# Altium PCB TIDA-010967_PCB.PcbDoc (part 1 of 5)
Units mil, origin at the board's own origin, x right, y up, seen from the top; angles counter-clockwise.
Board outline 2322.7 x 960 mil, 2 copper layers (Top Layer, Bottom Layer), stack 44.731 mil thick; 178 components, 80 nets, 496 pads, 399 vias.
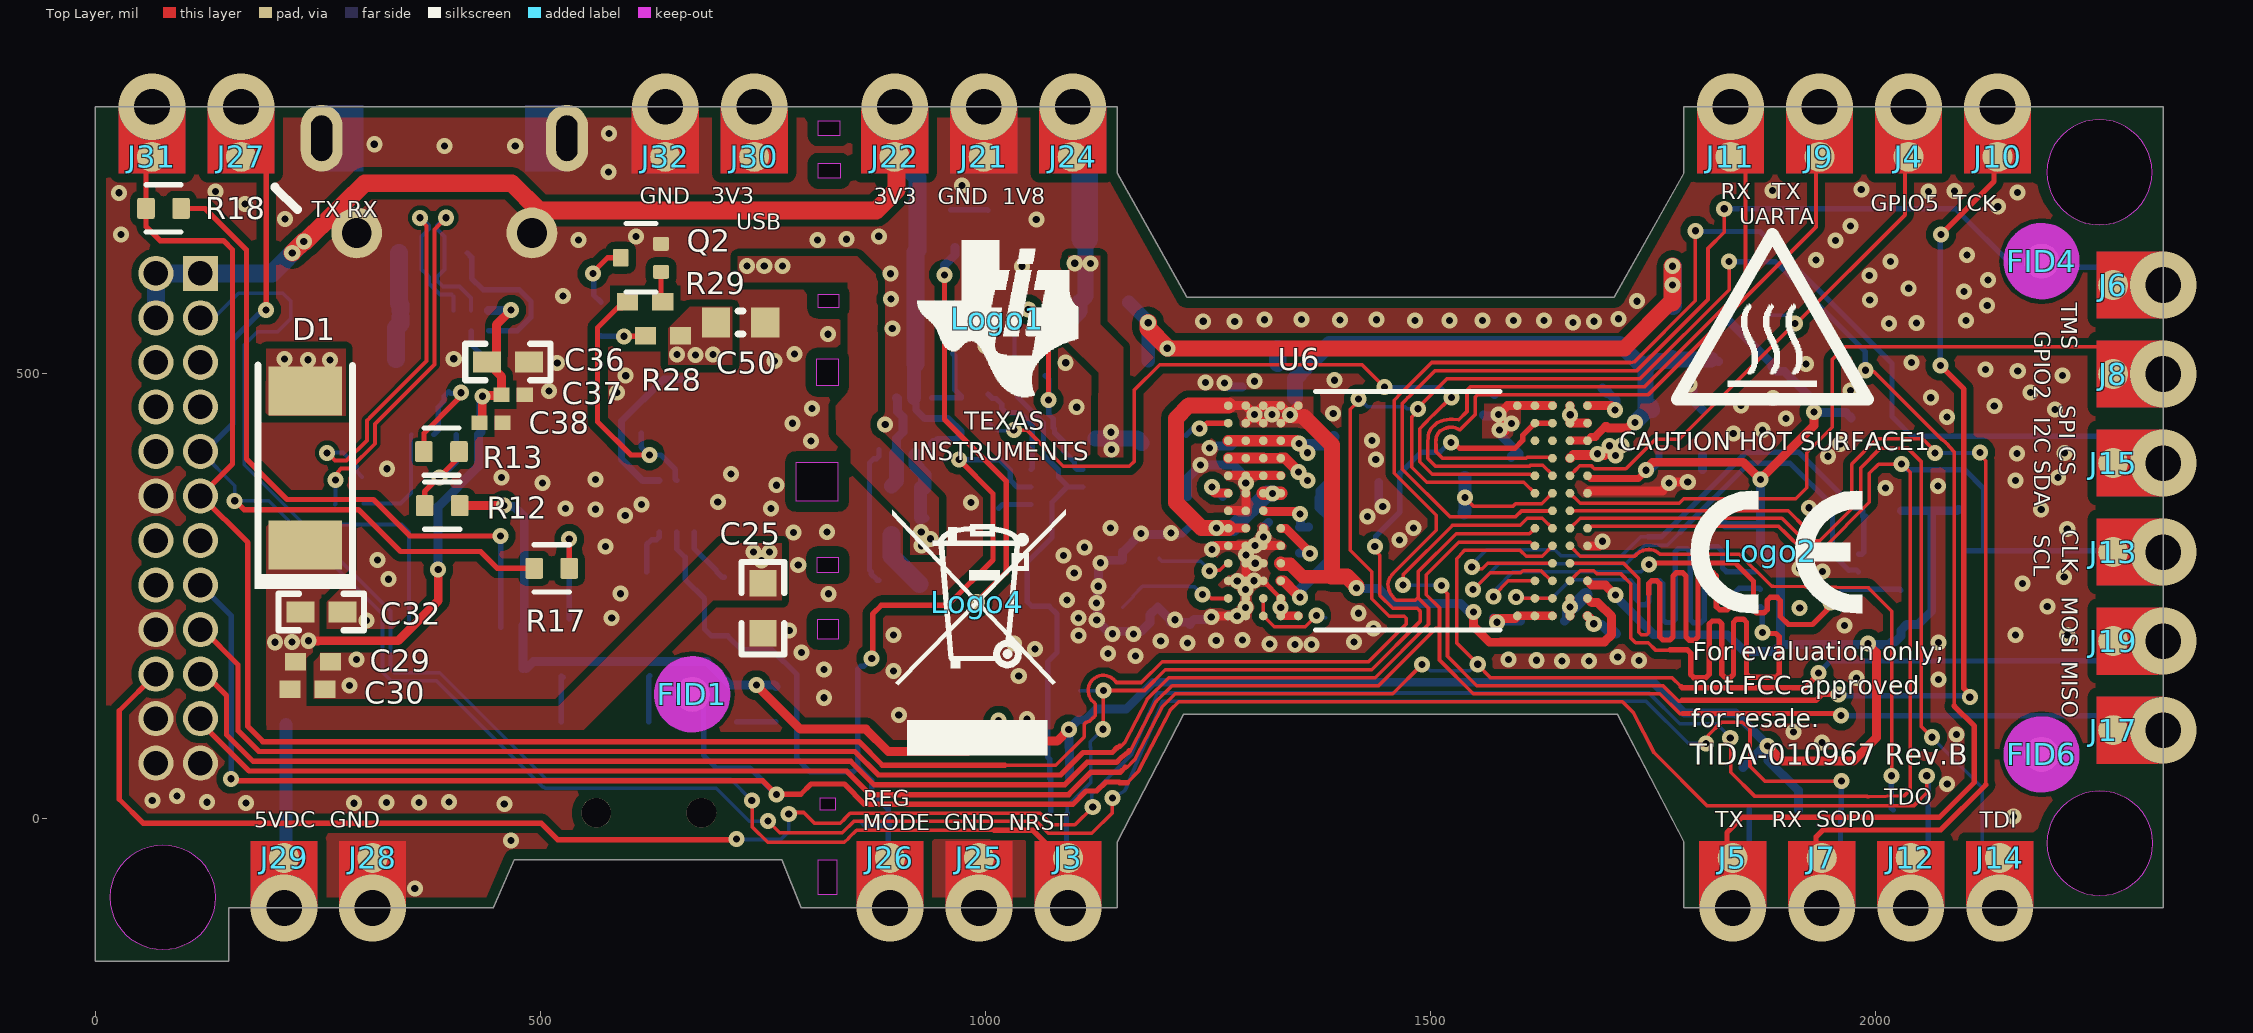
[diagram p0: Top Layer view]
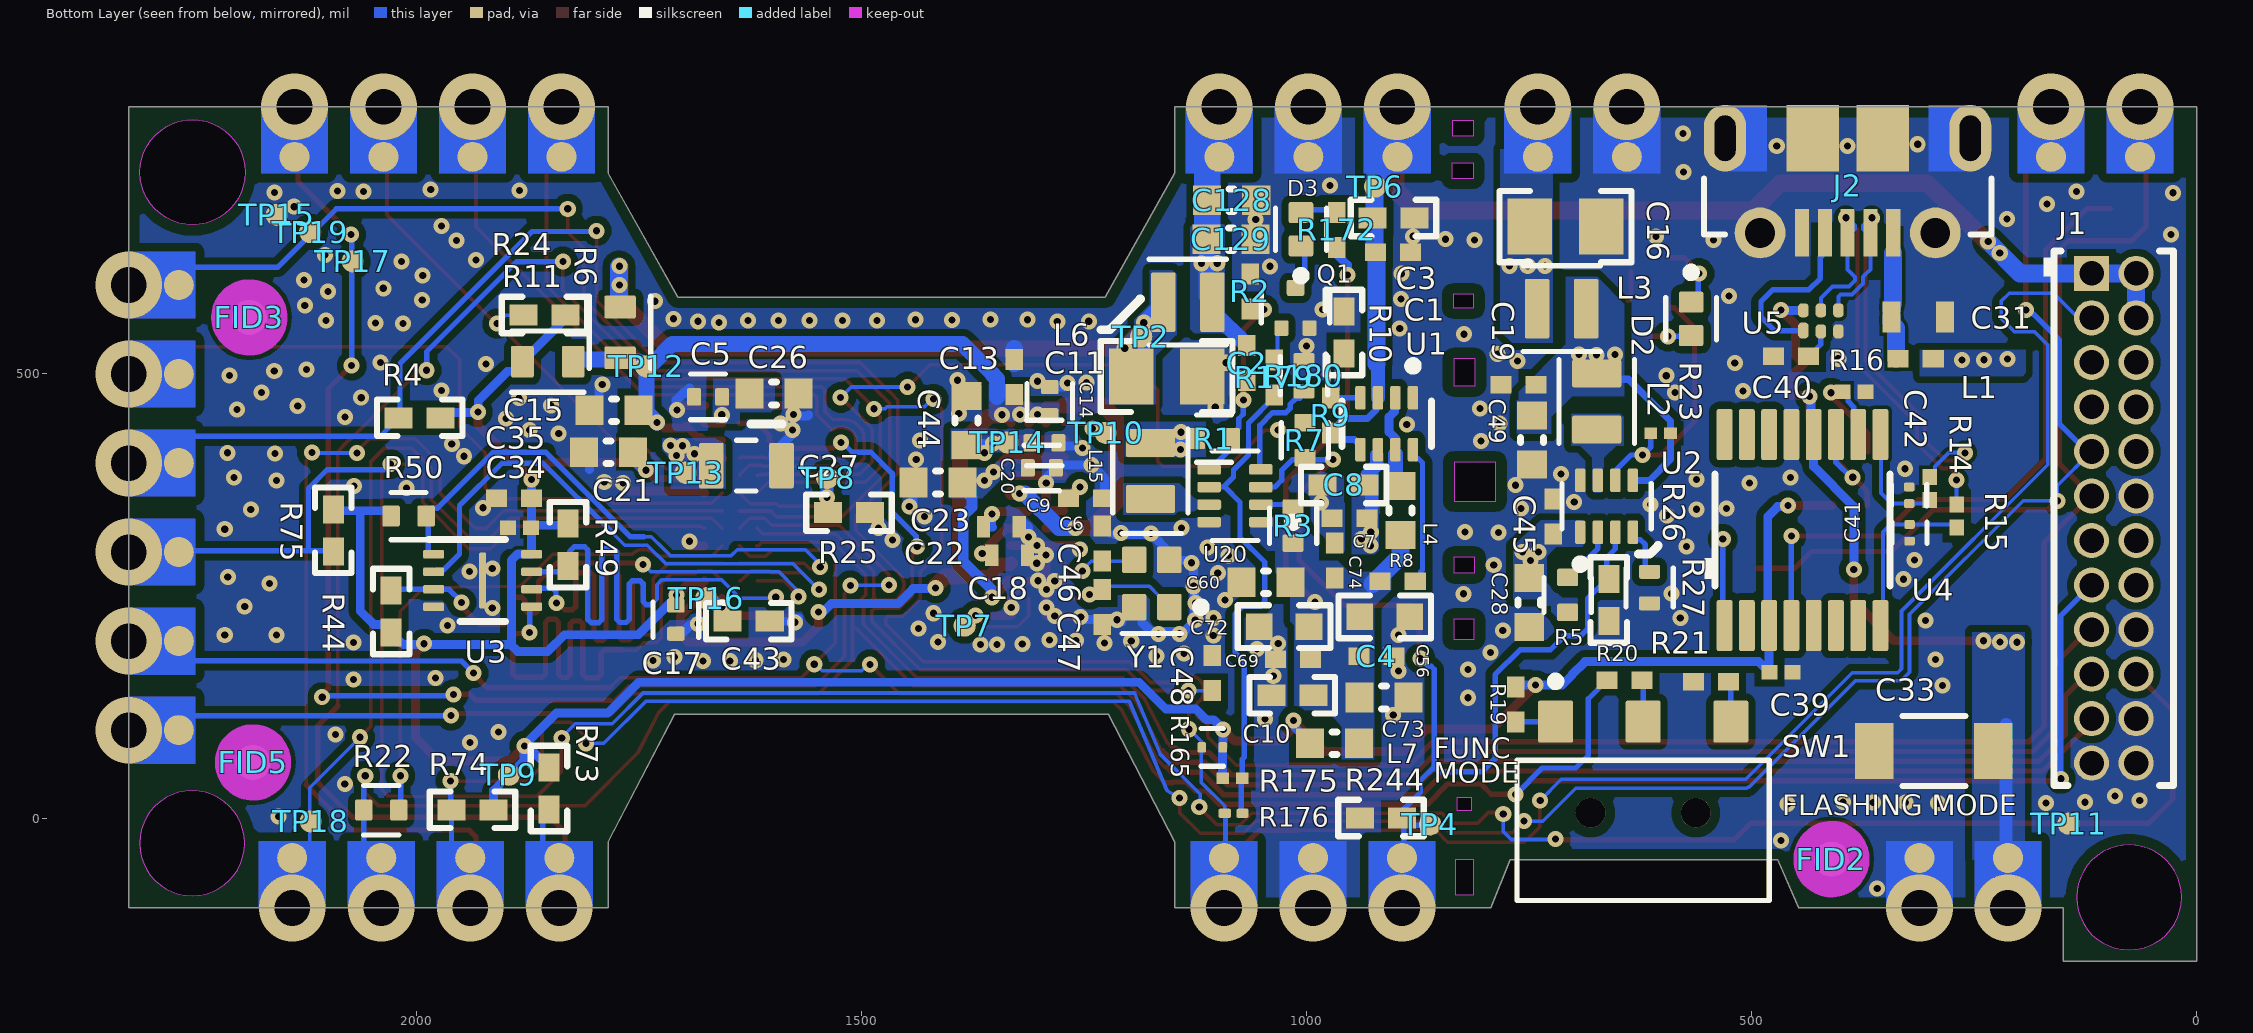
[diagram p1: Bottom Layer view, seen from below]

## Layer stack, top to bottom
Top Solder: solder mask 0.4, Solder Resist, Dk 4.5
Top Layer: signal copper 1.401
Dielectric 1: core 41.929, FR-4 High Tg135 (KB-6164), Dk 4.5
Bottom Layer: signal copper 1.401
Bottom Solder: solder mask 0.4, Solder Resist, Dk 4.5

## Board outline
150,-160 150,-100 447,-100 470.42,-45.84 470.38,-45.81 771.2,-45.81 770.94,-45.67 793,-100 1147.72,-100 1147.72,-25.77 1222.67,117.74 1709.51,117.74 1784.42,-25.77 1784.42,-100 2322.7,-100 2322.7,800 1784.42,800 1784.42,725.77 1705.96,586 1225.82,586 1147.73,725.77 1147.73,800 0,800 0,-160
cut-out: 2192.07,726.38 ccw(c2251.12,726.38) 2251.12,667.32 ccw(c2251.12,726.38) 2310.18,726.38 ccw(c2251.12,726.38) 2251.12,785.43 ccw(c2251.12,726.38)
cut-out: 75.87,-147.12 cw(c75.87,-88.07) 16.81,-88.07 cw(c75.87,-88.07) 75.87,-29.01 cw(c75.87,-88.07) 134.92,-88.07 cw(c75.87,-88.07)
cut-out: 2192.49,-27.28 cw(c2251.54,-27.28) 2251.54,31.77 cw(c2251.54,-27.28) 2310.6,-27.28 cw(c2251.54,-27.28) 2251.54,-86.34 cw(c2251.54,-27.28)
cut-out: 787.23,357.01 787.23,400.93 834.15,400.93 834.15,357.01
cut-out: 811.61,202.06 811.61,224.32 834.73,224.32 834.73,202.06
cut-out: 810.96,276.6 810.96,294.06 834.49,294.06 834.49,276.6
cut-out: 812.12,719.77 812.12,736.24 836.79,736.24 836.79,719.77
cut-out: 811.87,574.08 811.87,589.42 835.26,589.42 835.26,574.08
cut-out: 812.12,767.55 812.12,784.24 836.23,784.24 836.23,767.55
cut-out: 810.45,486.64 810.45,516.86 834.73,516.86 834.73,486.64
cut-out: 814.29,9.7 814.29,23.97 830.94,23.97 830.94,9.7
cut-out: 812.08,-85.22 812.08,-45.84 833,-45.84 833,-85.22

## Design rules (kind name [scope] priority, off if disabled: settings)
AcuteAngle [All] p1 off: minimum=4.50000000000000E+0001 checktracksonly=FALSE
AssemblyTestPointUsage [All] p1: valid=2
BoardOutlineClearance [All] p1: gap=12 ignorepadtopadclearanceinfootprint=FALSE
Clearance Clearance_Keepout [IsKeepOut] p1: gap=5 ignorepadtopadclearanceinfootprint=TRUE
Clearance "Clearance_TX and RX" [InNetClass('TX and RX')] p2: gap=8 ignorepadtopadclearanceinfootprint=FALSE except(0: Text-Hole; 4: Arc-Text Track-Text SMDPad-Text THPad-Text Via-Text Fill-Text Poly-Text Region-Text Text-Text; 5.3: Arc-Via Arc-Fill Arc-Poly Arc-Region Track-Via Track-Fill Track-Poly Track-Region Poly-Region; 6: Arc-Hole Track-Hole SMDPad-Via SMDPad-Hole THPad-Hole Via-Hole; 7.7: Fill-Fill Fill-Poly Fill-Region Poly-Poly Region-Region; 10: Arc-SMDPad Arc-THPad Track-SMDPad Track-THPad SMDPad-SMDPad SMDPad-THPad THPad-THPad THPad-Via; 11: Fill-Hole Poly-Hole Region-Hole)
Clearance Clearance_BGA [WithinRoom('BGA1')] p3: gap=4 ignorepadtopadclearanceinfootprint=FALSE except(8: Fill-Fill Fill-Poly Fill-Region Poly-Poly Poly-Region Region-Region; 10: Fill-Hole Poly-Hole Region-Hole)
Clearance Clearance_USB [WithinRoom('USB')] p4: gap=4 ignorepadtopadclearanceinfootprint=FALSE except(8: Fill-Fill Fill-Poly Fill-Region Poly-Poly Poly-Region Region-Region; 10: Fill-Hole Poly-Hole Region-Hole)
Clearance "top and bottom" [OnTopLayer or OnBottomLayer] p5: gap=6 ignorepadtopadclearanceinfootprint=TRUE except(5: Arc-Arc Arc-Track Arc-SMDPad Arc-Hole Track-Track Track-SMDPad Track-Hole SMDPad-Hole THPad-Hole Via-Hole Text-Hole; 5.1: SMDPad-SMDPad; 7: Arc-Fill Arc-Poly Arc-Region Track-Fill Track-Region; 8: Track-Poly SMDPad-Fill SMDPad-Poly SMDPad-Region THPad-Fill THPad-Poly THPad-Region Via-Fill Via-Poly Via-Region Poly-Poly; 10: Fill-Fill Fill-Poly Fill-Region Poly-Region Region-Region; 11: Fill-Hole Poly-Hole Region-Hole)
Clearance Clearance_KO-J5 [IsKeepOut and IsTrack vs InComponent('J5')] p6: gap=19.6 ignorepadtopadclearanceinfootprint=FALSE
Clearance [All] p7: gap=6 ignorepadtopadclearanceinfootprint=TRUE except(0: Text-Hole; 5: Arc-Arc Arc-Track Arc-SMDPad Track-Track Track-SMDPad; 5.1: SMDPad-SMDPad; 7: Arc-Fill Arc-Poly Arc-Region Track-Fill Track-Region; 8: SMDPad-Fill SMDPad-Poly SMDPad-Region THPad-Fill THPad-Poly THPad-Region; 10: Fill-Fill Fill-Poly Fill-Region Poly-Region Region-Region; 11: Fill-Hole Poly-Hole Region-Hole; 12: Track-Poly; 15: Poly-Poly)
Clearance Same_net [All] p8: gap=0 ignorepadtopadclearanceinfootprint=TRUE
ComponentClearance ComponentClearance_MatingCon-3D [All vs not InAnyComponent] p1: gap=0 collisioncheckmode=3 verticalgap=0 showdistances=FALSE
ComponentClearance "ComponentClearance_WEE Logo" [InComponent('Logo4')] p2: gap=0 collisioncheckmode=3 verticalgap=0 showdistances=TRUE
ComponentClearance ComponentClearance_R77 [InComponent('R77') vs InComponent('Logo1')] p3: gap=0 collisioncheckmode=3 verticalgap=0 showdistances=TRUE
ComponentClearance ComponentClearance_Logo [InComponentClass('Logo')] p4: gap=0 collisioncheckmode=3 verticalgap=0 showdistances=TRUE
ComponentClearance "ComponentClearance_Mounting Holes_Fiducial Marks" [InComponentClass('FiducialMark') vs InPadClass('Mounting Holes PADS')] p5: gap=50 collisioncheckmode=3 verticalgap=10 showdistances=TRUE
ComponentClearance [All] p6: gap=6 collisioncheckmode=3 verticalgap=10 showdistances=TRUE
DiffPairsRouting 90ohm [All] p1: maxlimit=4.5 minlimit=4.5 mostfreqgap=4.5 toplayer_minwidth=4.5 toplayer_maxwidth=4.5 toplayer_prefwidth=4.5 bottomlayer_minwidth=4.5 bottomlayer_maxwidth=4.5 bottomlayer_prefwidth=4.5 maxuncoupledlength=500
FabricationTestPointUsage TestPointUsage [All] p1: valid=2 allowmultiple=FALSE
FabricationTestpoint Testpoint [All] p1: side=3 testpointundercomponent=TRUE minsize=40 maxsize=100 preferedsize=60 minholesize=0 maxholesize=40 preferedholesize=32 testpointgrid=1 allowsidetop=TRUE allowsidebottom=TRUE usegrid=TRUE gridtolerance=0.01
FanoutControl Fanout_LCC [IsLCC] p1: bgadir=Out bgaviamode=Centered fanoutstyle=Auto fanoutdirection=Alternating viagrid=1 // Fanout_LCC (Default Rule)
FanoutControl Fanout_BGA [IsBGA] p2: bgadir=Out bgaviamode=Centered fanoutstyle=Auto fanoutdirection=Alternating viagrid=1 // Fanout_BGA (Default Rule)
FanoutControl Fanout_Default [All] p4: bgadir=Out bgaviamode=Centered fanoutstyle=Auto fanoutdirection=Alternating viagrid=1 // Fanout_Default (Default Rule)
FanoutControl Fanout_Small [(CompPinCount < 5)] p5: bgadir=Out bgaviamode=Centered fanoutstyle=Auto fanoutdirection=OutThenIn viagrid=1 // Fanout_Small (Default Rule)
Height Room_Hieght [WithinRoom('Room_Hieght 1 MM')] p1: minheight=0 maxheight=41.34 prefheight=39.37
HoleSize [All] p1: absolutevalues=TRUE maxlimit=280 minlimit=5.9 maxpercent=80.000 minpercent=20.000
HoleToHoleClearance HoleToHoleClearance_1 [WithinRoom('BGA1')] p1: gap=4 allowstackedmicrovias=FALSE
MatchedLengths MatchLengths_xSignals_U3_U6 [InxSignalClass('xSignals_U3_U6_MatchLengthsClass')] p1: tolerance=30 checknetsindiffpair=FALSE checkdiffpairvsdiffpair=TRUE checkxsignals=TRUE checkothers=TRUE
MatchedLengths MatchLengths_xSignals_U2_U1_1 [InxSignalClass('xSignals_U2_U1_MatchLengthsClass_1')] p2: tolerance=100 checknetsindiffpair=FALSE checkdiffpairvsdiffpair=TRUE checkxsignals=TRUE checkothers=TRUE
MatchedLengths MatchLengths_U2_Passives_U1 [InxSignalClass('xSignals_U2_Passives_U1_MatchLengthsClass')] p3: tolerance=100 checknetsindiffpair=FALSE checkdiffpairvsdiffpair=TRUE checkxsignals=TRUE checkothers=TRUE
MatchedLengths MatchLengths_xSignals_U2_Passives [InxSignalClass('xSignals_U2_Passives_MatchLengthsClass')] p4: tolerance=100 checknetsindiffpair=FALSE checkdiffpairvsdiffpair=TRUE checkxsignals=TRUE checkothers=TRUE
MatchedLengths MatchLengths_xSignals_U2_U1 [InxSignalClass('xSignals_U2_U1_MatchLengthsClass')] p5: tolerance=100 checknetsindiffpair=FALSE checkdiffpairvsdiffpair=TRUE checkxsignals=TRUE checkothers=TRUE
MatchedLengths [InxSignalClass('QPSI')] p6: tolerance=10 checknetsindiffpair=FALSE checkdiffpairvsdiffpair=TRUE checkxsignals=TRUE checkothers=TRUE
MinimumAnnularRing MinimumAnnularRing_ThermalPadVias [IsVia and InAnyComponent] p1: minimumring=3.9
MinimumAnnularRing [All] p2: minimumring=3.9
MinimumSolderMaskSliver MinimumSolderMaskSliver_Logo [InComponentClass('Logo') vs InComponentClass('Logo')] p1: minsoldermaskwidth=0.7
MinimumSolderMaskSliver [All] p2: minsoldermaskwidth=3.5
PlaneConnect [All] p1: planeconnectstyle=Relief reliefexpansion=10 reliefentries=4 reliefconductorwidth=10 reliefairgap=10
PolygonConnect [All] p1: connectstyle=Direct reliefconductorwidth=10 reliefentries=4 polygonreliefangle="90 Angle" airgapwidth=10
RoomDefinition BGA1 [InComponentClass('Components Class 2')] p1: confinementstyle=ConfineIn formatcopy=TRUE lockcomponents=FALSE outline 1572.65,427.73 1907.13,427.73 1907.13,252.98 1572.65,252.98
RoomDefinition USB [InComponentClass('Components Class 2')] p2: confinementstyle=ConfineIn formatcopy=TRUE lockcomponents=FALSE outline 252.62,689.5 405.92,689.5 405.92,368.59 252.62,368.59
RoutingVias ThermalPadVias [IsVia and InAnyComponent] p1: holewidth=7.87 width=19.68 viastyle="Through Hole" minholewidth=5 minwidth=13 maxholewidth=12.99 maxwidth=23.62
RoutingVias [All] p2: holewidth=12.2 width=22.4 viastyle="Through Hole" minholewidth=5.9 minwidth=14 maxholewidth=20 maxwidth=40
SMDToCorner [All] p1: distance=25000
SilkToBoardRegionClearance [Not ((IsComment or IsDesignator) And (Hide <> 'False')) and not InRegion(1000,500,4000,800)] p1:
SilkToSilkClearance [All] p1: silktosilkclearance=3
SilkToSolderMaskClearance SilkToSolderMaskClearance_OutLine [istrack and InAnyComponent] p1: minsilkscreentomaskgap=0 clearancetoexposedcopper=FALSE
SilkToSolderMaskClearance SilkscreenOverComponentPads [IsPad] p2: minsilkscreentomaskgap=3 clearancetoexposedcopper=FALSE
SolderMaskExpansion [All] p1: expansion=0 istentingtop=FALSE
SupplyNets "Schematic Supply Nets_18" [InNet('RADAR_1V_RF_OUT')] p1: voltage=0.000
SupplyNets "Schematic Supply Nets_17" [InNet('5V_IN_USB')] p2: voltage=0.000
SupplyNets "Schematic Supply Nets_16" [InNet('OUT_3V3')] p3: voltage=0.000
SupplyNets "Schematic Supply Nets_15" [InNet('REG_OUT_1V8')] p4: voltage=0.000
SupplyNets "Schematic Supply Nets_14" [InNet('REG_3V3')] p5: voltage=0.000
SupplyNets "Schematic Supply Nets_13" [InNet('RADAR_1V4_APLL')] p6: voltage=0.000
SupplyNets "Schematic Supply Nets_12" [InNet('RADAR_SRAM_1V2')] p7: voltage=0.000
SupplyNets "Schematic Supply Nets_11" [InNet('GND')] p8: voltage=0.000
SupplyNets "Schematic Supply Nets_10" [InNet('RADAR_1V2')] p9: voltage=0.000
SupplyNets "Schematic Supply Nets_9" [InNet('RADAR_1P2_RF')] p10: voltage=0.000
SupplyNets "Schematic Supply Nets_8" [InNet('RADAR_1V8')] p11: voltage=0.000
SupplyNets "Schematic Supply Nets_7" [InNet('RADAR_1V4_SYNTH')] p12: voltage=0.000
SupplyNets "Schematic Supply Nets_6" [InNet('USB_5V')] p13: voltage=0.000
SupplyNets "Schematic Supply Nets_5" [InNet('USB_INPUT_3V3')] p14: voltage=0.000
SupplyNets "Schematic Supply Nets_4" [InNet('RADAR_3V3')] p15: voltage=0.000
SupplyNets "Schematic Supply Nets_3" [InNet('REG_1V8')] p16: voltage=0.000
SupplyNets "Schematic Supply Nets_2" [InNet('VPP_1P7')] p17: voltage=0.000
SupplyNets "Schematic Supply Nets_1" [InNet('RADAR_VBGAP')] p18: voltage=0.000
SupplyNets "Schematic Supply Nets" [InNet('DC_OUT_3V3')] p19: voltage=0.000
UnRoutedNet [All] p1: checkbadconnections=TRUE
Width [All] p1: maxlimit=100 minlimit=4 preferedwidth=10 toplayer_prefwidth=6 minimp=50.000000 maximp=50.000000 favimp=50.000000
12 further rules are at their usual default settings.

## Classes and differential pairs
component class TIDA-010967_xWRL6432_Chip: C43 C46 C47 C48 R4 R22 R24 R25 R73 R74 R75 R165 TP7 TP8 TP10 TP12 TP13 TP14 TP15 TP16 TP17 TP18 TP19 U6 Y1
component class TIDA-010967_USB_PWR_Connector: C29 C30 C31 C32 C33 C36 C37 C38 C39 C40 C41 C42 D1 J1 J2 J3 J4 J5 J6 J7 J8 J9 J10 J11 J12 J13 J14 J15 J17 J19 J21 J22 J24 J25 J26 J27 J28 J29 J30 J31 J32 J? L1 R12 R13 R14 R15 R16 R17 R18 R19 R20 R21 SW1 U4 U5
component class TIDA-010967_QSPI_Flash: C34 C35 R44 R49 R50 U3
component class TIDA-010967_Decoupling_caps: C5 C6 C9 C13 C14 C15 C17 C18 C20 C21 C22 C23 C26 C27 C44 L7 R6 R11
component class TIDA-010967_DC_Regulators: C1 C2 C3 C4 C7 C8 C10 C11 C16 C19 C25 C28 C45 C49 C50 C56 C60 C69 C72 C73 C74 C128 C129 D2 D3 L2 L3 L4 L6 L15 Q1 Q2 R1 R2 R3 R5 R7 R8 R9 R10 R23 R26 R27 R28 R29 R172 R175 R176 R179 R180 R244 TP2 TP4 TP6 TP9 TP11 U1 U2 U20
net class POWER: PMIC_CLKOUT_SOP1 REG_1V8 REG_OUT_1V8
net class Regions: GND XTALP
component class Logo: Logo1
component class FiducialMark: FID1 FID2 FID3 FID4 FID5 FID6
component class TIDA-010967_Hardware: "CAUTION HOT SURFACE1" FID1 FID2 FID3 FID4 FID5 FID6 Logo1 Logo2 Logo4 ZZ1 ZZ2 ZZ3 ZZ4 ZZ5
component class AssemblyNote: ZZ1 ZZ2 ZZ3 ZZ4 ZZ5
component class Header: J1 LD2 LD4 SW2
differential pair USB_DifferentialPair1: +USB_DP -USB_DM
differential pair CAN: +"" -""
differential pair LVDS_FRCLK: +"" -""
differential pair LVDS_FRCLK_DP8: +"" -""
differential pair LVDS_CLK: +"" -""
differential pair LVDS_CLK_DP7: +"" -""
differential pair LVDS_3: +"" -""
differential pair LVDS_3_DP6: +"" -""
differential pair LVDS_2: +"" -""
differential pair LVDS_2_DP5: +"" -""
differential pair LVDS_1: +"" -""
differential pair LVDS_1_DP4: +"" -""
differential pair LVDS_0: +"" -""
differential pair LVDS_0_DP3: +"" -""
differential pair USB_DP1: +USBDP -USBDM

## Components (designator, comment, footprint, x,y, rotation, side; value= is the part's Value field where it differs from the comment)
C1 "GRT155C81A105KE01D" 0402L 902.62,636.34 r180 bottom value=1uF
C2 "GRM1555C1H100JA01D" 0402L 1066.97,512.13 r270 bottom value=10pF
C3 "GCM155R71H104KE02D" 0402 902.23,675.03 r180 bottom value=0.1uF
C4 "GRT155C81A105KE01D" 0402L 921.46,182.75 r180 bottom value=1uF
C5 "GRM155R61A225ME01D" FP-GRM155R61A225ME01D_0402-MFG 1672.07,474.04 r180 bottom value=2.2¦ÌF
C6 "C1005X7R1H473K050BB" 0402L 1247.52,360.04 r180 bottom value=0.047uF
C7 "GRT155C81A105KE01D" 0402L 951.51,337.76 r0 bottom value=1uF
C8 "GCM155R71H104KE02D" 0402 958.13,375.12 r180 bottom value=0.1uF
C9 "GRM155R61A225ME01D" FP-GRM155R61A225ME01D_0402-MFG 1297.18,394.28 r0 bottom value=2.2¦ÌF
C10 "GCM155R71H104KE02D" 0402 1015.77,138.92 r0 bottom value=0.1uF
C11 "GRM21BR61A476ME15L" 0805_HV 1156.96,496.95 r180 bottom value=47uF
C13 "GRM155R71C224KA12D" 0402L 1328.14,496.44 r90 bottom value=0.22uF
C14 "GRM155R61A225ME01D" FP-GRM155R61A225ME01D_0402-MFG 1288.21,469.2 r270 bottom value=2.2¦ÌF
C15 "GRM188Z71A106MA73D" 0603L 1777.87,459.12 r0 bottom value=10uF
C16 "GRM21BR61A476ME15L" 0805_HV 708.95,665.27 r180 bottom value=47uF
C17 "GRM155R61A225ME01D" FP-GRM155R61A225ME01D_0402-MFG 1708.25,223.76 r90 bottom value=2.2¦ÌF
C18 "GRM155R70J105KA12D" 0402S 1333.23,296.06 r180 bottom value=1uF
C19 "GRM1555C1H100JA01D" 0402L 761.79,487.87 r0 bottom value=10pF
C20 "GRM155R61A225ME01D" FP-GRM155R61A225ME01D_0402-MFG 1294.33,422.3 r0 bottom value=2.2¦ÌF
C21 "GRM188Z71A106MA73D" 0603L 1783.84,411.93 r0 bottom value=10uF
C22 "GRM155R70J105KA12D" 0402S 1342.73,328.1 r180 bottom value=1uF
C23 "GRM188Z71A106MA73D" 0603L 1414,377.89 r0 bottom value=10uF
C25 "GRM188Z71A106MA73D" 0603_HV 749.85,236.7 r270 top value=10uF
C26 "GRM188Z71A106MA73D" 0603L 1598.21,477.81 r180 bottom value=10uF
C27 "GCJ21BR71C475KA01L" FP-GCJ21BR71C475KA01L_0805-MFG 1628.97,396.86 r0 bottom value=4.7¦ÌF
C28 "GRM188R71C474KA88D" 0603L 749.79,243.27 r270 bottom value=0.47uF
C29 "GCM155R71C224KE02D" 0402L 244.49,176.81 r180 top value=0.22uF
C30 "GCM155C71A474KE36D" 0402L 238.1,145.91 r0 top value=0.47uF
C31 "GRT188R61A106KE13D" 0603S 312.8,563.93 r0 bottom value=10uF
C32 "GRM155R61A106ME11D" 0402 253.83,232.53 r180 top value=10uF
C33 "GRM31CR61A476KE15L" 1206_180 295.19,76.51 r0 bottom value=47uF
C34 "GRM033C71A104KE14D" 0201 1883.74,326.93 r180 bottom value=0.1uF
C35 "GRM155R70J105KA12D" 0402L 1890.11,359.96 r0 bottom value=1uF
C36 "0402ZD106MAT2A" 0402_080 463.4,513.17 r0 top value=10uF
C37 "GRM033R61C104KE84D" 0201_033 469.41,476.41 r0 top value=0.1uF
C38 "GRM033R70J103KA01D" 0201 444.44,444.93 r0 top value=0.01uF
C39 "GRM033R61C104KE84D" 0201_033 466.96,164.72 r180 bottom value=0.1uF
C40 "GRM033R61C104KE84D" 0201_033 384.79,479.89 r180 bottom value=0.1uF
C41 "GCM0335C1E220JA16D" FP-GCM0335C1E220JA16D_0201-MFG 322.55,321.38 r90 bottom value=22pF
C42 "GCM0335C1E220JA16D" FP-GCM0335C1E220JA16D_0201-MFG 322.97,363.59 r270 bottom value=22pF
C43 "C1005X7R1H104K050BE" 0402 1626.41,222.13 r180 bottom value=0.1uF
C44 "GRM188Z71A106MA73D" 0603L 1381.93,447.66 r90 bottom value=10uF
C45 "GRM1555C1H471JA01D" 0402L 722.49,339.81 r90 bottom value=470pF
C46 "GJM1555C1H4R7BB01D" 0402L 1229.42,309.15 r270 bottom value=4.7pF
C47 "GJM1555C1H4R7BB01D" 0402L 1229.56,237.9 r90 bottom value=4.7pF
C48 "CL05B224KO5NNNC" 0402L 1105.76,163.78 r270 bottom value=0.22uF
C49 "GRM188Z71A106MA73D" 0603L 746.45,425.59 r270 bottom value=10uF
C50 "GRM188Z71A106MA73D" 0603L 724.93,557.48 r0 top value=10uF
C56 "GRM188Z71A106MA73D" 0603_HV 911.95,227 r180 bottom value=10uF
C60 "GRM188R71C474KA88D" 0603L 1045.37,265.79 r0 bottom value=0.47uF
C69 "GRM1555C1H471JA01D" 0402L 1015.01,179.1 r0 bottom value=470pF
C72 "GRM188Z71A106MA73D" 0603_HV 1025.05,215.91 r0 bottom value=10uF
C73 "GRM188R71C474KA88D" 0603L 912.93,136.47 r180 bottom value=0.47uF
C74 "GRM1555C1H471JA01D" 0402L 968.4,290.29 r90 bottom value=470pF
C128 "GRM188Z71A106MA73D" 0603L 1083.88,695.03 r180 bottom value=10uF
C129 "GRM188Z71A106MA73D" 0603L 1084.82,651.17 r180 bottom value=10uF
"CAUTION HOT SURFACE1" "CAUTION HOT SURFACE" IEC_HotSurface_Small 1883.74,564.43 r0 top
D1 "PMEG3020EP,115" SOD-128 235.78,394.13 r90 top value=30V
D2 "VLMY1500-GS08" FP-VLMY1500-GS08_0402-MFG 567.93,561.74 r270 bottom
D3 "VLMY1500-GS08" FP-VLMY1500-GS08_0402-MFG 1006.08,662.34 r90 bottom
FID1 "Fiducial" Fiducial10-20 670.53,139.97 r0 top
FID2 "Fiducial" Fiducial10-20 410.19,-45.15 r90 bottom
FID3 "Fiducial" Fiducial10-20 2187.29,563.32 r90 bottom
FID4 "Fiducial" Fiducial10-20 2186.11,626.55 r0 top
FID5 "Fiducial" Fiducial10-20 2183.2,63.48 r90 bottom
FID6 "Fiducial" Fiducial10-20 2186.07,72.45 r0 top
J1 "GRPB122VWVN-RC" Sullins_GRPB122VWVN 93.1,337.73 r180 bottom
J2 "105017-0001" CONN_105017-0001 391.99,711.45 r0 bottom
J3 "Castellation 2.54mm" "FP-Castellation 2.54mm_75mills" 1092.59,-100 r90 top
J4 "Castellation 2.54mm" "FP-Castellation 2.54mm_75mills" 2036.65,800 r270 top
J5 "Castellation 2.54mm" "FP-Castellation 2.54mm_75mills" 1839.17,-100 r90 top
J6 "Castellation 2.54mm" "FP-Castellation 2.54mm_75mills" 2322.82,599.73 r180 top
J7 "Castellation 2.54mm" "FP-Castellation 2.54mm_75mills" 1939.17,-100 r90 top
J8 "Castellation 2.54mm" "FP-Castellation 2.54mm_75mills" 2322.82,499.73 r180 top
J9 "Castellation 2.54mm" "FP-Castellation 2.54mm_75mills" 1936.65,800 r270 top
J10 "Castellation 2.54mm" "FP-Castellation 2.54mm_75mills" 2136.65,800 r270 top
J11 "Castellation 2.54mm" "FP-Castellation 2.54mm_75mills" 1836.65,800 r270 top
J12 "Castellation 2.54mm" "FP-Castellation 2.54mm_75mills" 2039.17,-100 r90 top
J13 "Castellation 2.54mm" "FP-Castellation 2.54mm_75mills" 2322.82,299.73 r180 top
J14 "Castellation 2.54mm" "FP-Castellation 2.54mm_75mills" 2139.17,-100 r90 top
J15 "Castellation 2.54mm" "FP-Castellation 2.54mm_75mills" 2322.82,399.73 r180 top
J17 "Castellation 2.54mm" "FP-Castellation 2.54mm_75mills" 2322.82,99.73 r180 top
J19 "Castellation 2.54mm" "FP-Castellation 2.54mm_75mills" 2322.82,199.73 r180 top
J21 "Castellation 2.54mm" "FP-Castellation 2.54mm_75mills" 997.82,800 r270 top
J22 "Castellation 2.54mm" "FP-Castellation 2.54mm_75mills" 897.82,800 r270 top
J24 "Castellation 2.54mm" "FP-Castellation 2.54mm_75mills" 1097.82,800 r270 top
J25 "Castellation 2.54mm" "FP-Castellation 2.54mm_75mills" 992.59,-100 r90 top
J26 "Castellation 2.54mm" "FP-Castellation 2.54mm_75mills" 892.59,-100 r90 top
J27 "Castellation 2.54mm" "FP-Castellation 2.54mm_75mills" 163.65,800 r270 top
J28 "Castellation 2.54mm" "FP-Castellation 2.54mm_75mills" 311.39,-100 r90 top
J29 "Castellation 2.54mm" "FP-Castellation 2.54mm_75mills" 212.04,-100 r90 top
J30 "Castellation 2.54mm" "FP-Castellation 2.54mm_75mills" 740.07,800 r270 top
J31 "Castellation 2.54mm" "FP-Castellation 2.54mm_75mills" 63.65,800 r270 top
J32 "Castellation 2.54mm" "FP-Castellation 2.54mm_75mills" 640.07,800 r270 top
L1 "BLM15PD300SZ1D" 0402L 315.56,516.74 r180 bottom
L2 "DFE201210U-R47M=P2" "FP-DFE201210U-R47M=P2_0805 (2012)-MFG" 673.87,468.87 r90 bottom value=0.47uH
L3 "SPH201610UR10MT" FP-SPH201610UR10MT_SMT_IND_2MM0_1MM6-MFG 713.35,573.15 r0 bottom value=0.1uH
L4 "BLM18KG121TH1D" 0603L 894.26,346.55 r270 bottom value="120 ohm"
L6 "SPH201610UR10MT" FP-SPH201610UR10MT_SMT_IND_2MM0_1MM6-MFG 1133.1,580.52 r0 bottom value=0.1uH
L7 "BLM18KG121TH1D" 0603L 968.27,84.96 r0 bottom value="120 ohm"
L15 "DFE201210U-R47M=P2" "FP-DFE201210U-R47M=P2_0805 (2012)-MFG" 1175.21,390.77 r90 bottom value=0.47uH
Logo1 "Texas Instruments" TI_Symbol_Overlay_Small 1013.33,561.7 r0 top
Logo2 "CE Mark" CE_Mark_3MM5 1881.62,300.64 r0 top
Logo4 "WEEE logo" WEEE_Minimum 990.53,243.57 r0 top
Q1 "SSM3K35AMFV,L3F" FP-SSM3K35AMFV,L3F_SOT-723-MFG 1012.23,573.86 r90 bottom
Q2 "SSM3K35AMFV,L3F" FP-SSM3K35AMFV,L3F_SOT-723-MFG 612.78,630.31 r180 top
R1 "RC0402JR-070RP" FP-RC0402JR-070RP_0402-MFG 1103.88,427.13 r0 bottom value=0
R2 "CRCW040240K2FKED" 0402L 1063.07,592.57 r270 bottom value=40.2k
R3 "RC0402JR-070RP" FP-RC0402JR-070RP_0402-MFG 1014.95,329.41 r270 bottom value=0
R4 "CRCW04022M00FKED" 0402 1995.98,450.51 r0 bottom value=2.00Meg
R5 "RC0402JR-070RP" FP-RC0402JR-070RP_0402-MFG 706.5,251.64 r270 bottom value=0
R6 "ERJ-3GEY0R00V" FP-ERJ-3GEY0R00V_0603-MFG 1770.96,546.48 r270 bottom
R7 "RC0402JR-070RP" FP-RC0402JR-070RP_0402-MFG 1001.68,425.43 r270 bottom value=0
R8 "CRCW040210K0FKED" 0402L 897.4,267.2 r180 bottom value=10.0k
R9 "CRCW040210K0FKED" 0402L 972.45,453.33 r270 bottom value=10.0k
R10 "CRCW0402100KFKED" 0402 957.75,546.48 r270 bottom value=100k
R11 "ERJ-3GEY0R00V" FP-ERJ-3GEY0R00V_0603-MFG 1852.06,513.68 r0 bottom
R12 "RC0402JR-070RP" FP-RC0402JR-070RP_0402-MFG 389.62,351.84 r180 top value=0
R13 "RC0402JR-070RP" FP-RC0402JR-070RP_0402-MFG 388.81,412.51 r0 top value=0
R14 "RC0201JR-0727RL" 0201 299.76,371.19 r270 bottom value=27
R15 "RC0201JR-0727RL" 0201 269.37,340.38 r270 bottom value=27
R16 "CRCW040210K0FKED" 0402L 455.47,519.53 r180 bottom value=10.0k
R17 "RC0402JR-070RP" FP-RC0402JR-070RP_0402-MFG 512.6,281.48 r0 top value=0
R18 "RC0402JR-070RP" FP-RC0402JR-070RP_0402-MFG 76.59,685.75 r0 top value=0
R19 "CRCW04027K87FKED" 0402L 764.63,128.76 r90 bottom value=7.87k
R20 "CRCW040210K0FKED" 0402L 642.55,155.99 r180 bottom value=10.0k
R21 "CRCW040282K5FKED" 0402L 545.5,153.87 r180 bottom value=82.5k
R22 "RT0402FRE0733R2L" FP-RT0402FRE0733R2L_0402-MFG 2039.17,9.95 r180 bottom value=33.2
R23 "CRCW0201100KFKED" 0201L 602.08,433.23 r0 bottom value=100k
R24 "CRCW04022M00FKED" 0402 1855.77,565.99 r0 bottom value=2.00Meg
R25 "CRCW04022M00FKED" 0402 1513.76,344 r180 bottom value=2.00Meg
R26 "RC0402FR-071ML" 0402 660.24,245.89 r270 bottom value=1.00Meg
R27 "CRCW040218K0FKEDC" FP-CRCW040218K0FKEDC_0402-MFG 614.57,259.9 r270 bottom value=18k
R28 "ERJ-2RKF5100X" 0402L 637.55,542.92 r180 top value=510
R29 "ERJ-2RKF5100X" 0402L 617.66,581.19 r180 top value=510
R44 "CRCW04022M00FKED" 0402 2028.01,232.97 r270 bottom value=2.00Meg
R49 "CRCW04022M00FKED" 0402 1829.52,307.97 r90 bottom value=2.00Meg
R50 "AC0402FR-0747K5L" FP-AC0402FR-0747K5L_0402-MFG 2008.47,340.16 r180 bottom value=47.5k
R73 "CRCW04022M00FKED" 0402 1850.85,34.28 r270 bottom value=2.00Meg
R74 "CRCW04022M00FKED" 0402 1936.65,10.2 r0 bottom value=2.00Meg
R75 "CRCW04022M00FKED" 0402 2092.97,324.18 r270 bottom value=2.00Meg
R165 "ERJ-1RHD1002C" FP-ERJ-1RHD1002C_0201-MFG 1105.76,80.38 r180 bottom value=10k
R172 "ERJ-2RKF5100X" 0402L 965.67,661.65 r90 bottom value=510
R175 "CRCW0201100KFKED" 0201L 1083.14,45.81 r180 bottom value=100k
R176 "RC0201JR-070RL" "FP-RC0201JR-070RL_0201 (0603 Metric)-IPC_C" 1081.76,6.3 r180 bottom
R179 "ERJ-2RKF5100X" 0402L 1036.12,495.93 r270 bottom value=510
R180 "CRCW040218K0FKEDC" FP-CRCW040218K0FKEDC_0402-MFG 1002.72,497.77 r90 bottom value=18k
R244 "RC0402FR-071ML" 0402 916.21,1.12 r0 bottom value=1.00Meg
SW1 "AYZ0102AGRLC" FP-AYZ0102AGRLC_SMT_SW_7MM2_5MM3-MFG 621.72,-12.81 r180 bottom
TP2 "TESTPOINT" TP_25MIL-SMT#1 1185.64,541.84 r90 top
TP4 "TESTPOINT" TP_25MIL-SMT#1 860.96,-6.11 r90 top
TP6 "TESTPOINT" TP_25MIL-SMT#2 922.72,710.33 r90 bottom
TP7 "TESTPOINT" TP_25MIL-SMT#2 1383.88,217.19 r90 bottom
TP8 "TESTPOINT" TP_25MIL-SMT#2 1538.18,383.04 r90 bottom
TP9 "TESTPOINT" TP_25MIL-SMT#1 1895.73,49.69 r90 top
TP10 "TESTPOINT" TP_25MIL-SMT#2 1225.4,433.56 r90 bottom
TP11 "TESTPOINT" TP_25MIL-SMT#1 143.85,-5.2 r90 top
TP12 "TESTPOINT" TP_25MIL-SMT#1 1741.78,508.42 r90 top
TP13 "TESTPOINT" TP_25MIL-SMT#2 1697.18,388.88 r90 bottom
TP14 "TESTPOINT" TP_25MIL-SMT#2 1335.56,422.85 r90 bottom
TP15 "TESTPOINT" TP_25MIL-SMT#2 2156.33,678.48 r90 bottom
TP16 "TESTPOINT" TP_25MIL-SMT#2 1673.88,247.98 r90 bottom
TP17 "TESTPOINT" TP_25MIL-SMT#1 2071.22,626.31 r90 top
TP18 "TESTPOINT" TP_25MIL-SMT#1 2118.21,-2.86 r90 top
TP19 "TESTPOINT" TP_25MIL-SMT#2 2119.04,659.24 r90 bottom
U1 "TPS2116DRLR" DRL0008A-MFG 909.82,443.88 r270 bottom
U2 "TPS6285021HQDRLRQ1" DRL0008A-MFG 662.79,351.17 r90 bottom
U3 "MX25R1635FZUIH0" USON-8L 1925.28,267.79 r180 bottom
U4 "FT230XS-R" SSOP-16 442.74,324.44 r90 bottom
U5 "TPD4E004DRYR" DRY0006A 422.12,559.47 r90 bottom
U6 "XI6432BRQAAMY" AMY0101A-MFG 1474.3,346.12 r180 top
U20 "TPS6285020MDRLR" DRL0008A-MFG 1080.17,362.99 r0 bottom
Y1 "XRCGB40M000F1S2GR0" FP-XRCGB40M000F1S2GR0_SMT_CRYSTAL_2MM0_1MM6-MFG 1173.63,264.5 r90 bottom
ZZ1 "This Assembly Note is for PCB labels only" AssemblyNoteLabel -1702.57,3094.58 r0 top
ZZ2 "These assemblies are ESD sensitive, ESD precautions shall be observed." AssemblyNote -1700.16,3016.6 r0 top
ZZ3 "These assemblies must be clean and free from flux and all contaminants. Use of no clean flux is not acceptable." AssemblyNote -1700.16,2929.79 r0 top
ZZ4 "These assemblies must comply with workmanship standards IPC-A-610 Class 2, unless otherwise specified." AssemblyNote -1679.59,2861.06 r0 top
ZZ5 "These assemblies must comply with workmanship standards IPC-A-610 Class 2, unless otherwise specified." AssemblyNote -1678.2,2773.47 r0 top

## Footprints (in the part's own frame and the unit in brackets; to place one, negate y for a bottom-side part, rotate by r counter-clockwise, add the part's x,y. Pads: shape width x height; smd on the part's side, far side on the other; paste and mask are expansions set on the pad)
0201 [mm] "Data from Kemet datasheet CC101_COM dated 7/28/11"
  rect 0.46x0.42 smd mask+0.048: 1(-0.33,0) 2(0.33,0)
  body extent -0.31,-0.16 0.31,0.16, height 0.26
0201_033 [mm] "SMD, 2-Leads, Height 0.33mm"
  rect 0.46x0.42 smd mask+0.048: 1(-0.33,0) 2(0.33,0)
  body extent -0.31,-0.16 0.31,0.16, height 0.33
0201L [mm] "Data from Kemet datasheet CC101_COM dated 7/28/11"
  rect 0.36x0.32 smd mask+0.048: 1(-0.28,0) 2(0.28,0)
  body extent -0.31,-0.16 0.31,0.16, height 0.26
0402 [mm] "0402 from SM-752 data"
  rect 0.8x0.6 smd: 1(-0.6,0) 2(0.6,0)
  silkscreen extent -1.22,-0.52 1.22,0.52, body extent -0.55,-0.3 0.55,0.3, height 0.6
0402_080 [mm] "SMD, 2-Leads, Body 1x0.5mm"
  rect 0.8x0.6 smd: 1(-0.6,0) 2(0.6,0)
  silkscreen extent -1.22,-0.52 1.22,0.52, body extent -0.65,-0.4 0.65,0.4, height 0.8
0402L [mm] "0402 from SM-752 data"
  rect 0.6x0.5 smd: 1(-0.5,0) 2(0.5,0)
  body extent -0.55,-0.3 0.55,0.3, height 0.6
0402S [mil] "Based on C0402S footprint from PADS legacy"
  rect 15x24 smd: 1(-20,0) 2(20,0)
  body extent -22,-12 22,12, height 24
0603_HV [mil] "Ernesto recommended land pattern.  26 mil between pads."
  rect 30x30 smd: 1(-28,0) 2(28,0)
  silkscreen extent -52,-24 52,24, body extent -34,-19 34,19, height 39
0603L [mm] "0603 from SM-752 data"
  rect 0.8x0.85 smd: 1(-0.7,0) 2(0.7,0)
  silkscreen extent -0.07,-0.33 0.07,0.33, body extent -0.87,-0.47 0.87,0.47, height 1
0603S [mil]
  rect 20x35 smd: 1(-30,0) 2(30,0)
  body extent -34,-19 34,19, height 39
0805_HV [mil] "0805 with 30mil clearance between pads"
  rect 50x63 smd: 1(-40,0) 2(40,0)
  silkscreen extent -74,-40 74,40, body extent -43,-29 43,29, height 57
1206_180 [mm] "1206_180"
  rect 1.1x1.6 smd: 1(-1.7,0) 2(1.7,0)
  silkscreen extent -0.9,-1 0.9,1, body extent -1.75,-0.95 1.75,0.95, height 1.8
AMY0101A-MFG [mm]
  round 0.25 smd paste+0 mask+0.05: A1(-5.125,3) A2(-4.625,3) A3(-4.125,3) A4(-3.625,3) A5(-3.125,3) A6(3.125,3) A7(3.625,3) A8(4.125,3) A9(4.625,3) A10(5.125,3) B1(-5.125,2.5) B2(-4.625,2.5) B3(-4.125,2.5) B4(-3.625,2.5) B7(3.625,2.5) B8(4.125,2.5) B9(4.625,2.5) B10(5.125,2.5) C1(-5.125,2) C2(-4.625,2) C3(-4.125,2) C4(-3.625,2) C7(3.625,2) C8(4.125,2) C9(4.625,2) C10(5.125,2) D2(-4.625,1.5) D3(-4.125,1.5) D7(3.625,1.5) D8(4.125,1.5) D9(4.625,1.5) D10(5.125,1.5) E1(-5.125,1) E2(-4.625,1) E3(-4.125,1) E4(-3.625,1) E7(3.625,1) E8(4.125,1) E9(4.625,1) E10(5.125,1) F1(-5.125,0.5) F2(-4.625,0.5) F3(-4.125,0.5) F4(-3.625,0.5) F7(3.625,0.5) F8(4.125,0.5) F9(4.625,0.5) F10(5.125,0.5) G2(-4.625,0) G3(-4.125,0) G8(4.125,0) G9(4.625,0) G10(5.125,0) H1(-5.125,-0.5) H2(-4.625,-0.5) H3(-4.125,-0.5) H4(-3.625,-0.5) H7(3.625,-0.5) H8(4.125,-0.5) H9(4.625,-0.5) H10(5.125,-0.5) J1(-5.125,-1) J2(-4.625,-1) J3(-4.125,-1) J4(-3.625,-1) J7(3.625,-1) J8(4.125,-1) J9(4.625,-1) J10(5.125,-1) K2(-4.625,-1.5) K3(-4.125,-1.5) K7(3.625,-1.5) K8(4.125,-1.5) K9(4.625,-1.5) K10(5.125,-1.5) L1(-5.125,-2) L2(-4.625,-2) L3(-4.125,-2) L4(-3.625,-2) L7(3.625,-2) L8(4.125,-2) L9(4.625,-2) L10(5.125,-2) M1(-5.125,-2.5) M2(-4.625,-2.5) M3(-4.125,-2.5) M4(-3.625,-2.5) M7(3.625,-2.5) M8(4.125,-2.5) M9(4.625,-2.5) M10(5.125,-2.5) N1(-5.125,-3) N2(-4.625,-3) N3(-4.125,-3) N4(-3.625,-3) N5(-3.125,-3) N6(3.125,-3) N7(3.625,-3) N8(4.125,-3) N9(4.625,-3) N10(5.125,-3)
  silkscreen extent -2.63,-3.4 2.63,3.4, body extent -6,-3.9 6,3.9, height 0.25
AssemblyNote [mil] "Assembly Note"
AssemblyNoteLabel [mil] "Assembly Note for PCB Labels"
CE_Mark_3MM5 [mil]
  silkscreen extent -90,-70 103,68
CONN_105017-0001 [mm] "Molex Micro USB-B"
  rect 0.4x1.35 smd: 1(-1.3,1.35) 2(-0.65,1.35) 3(0,1.35) 4(0.65,1.35) 5(1.3,1.35)
  oval 1.2x1.9 hole 0.6 slot 1.3 at 90 deg: 6(-3.5,-1.35) 9(3.5,-1.35)
  rect 1.5x1.9 smd: 7(-1,-1.35) 8(1,-1.35)
  round 1.45 hole 0.85: 10(2.5,1.35) 11(-2.5,1.35)
  Top Layer region: 3.5,-2.3 2.3,-2.3 2.3,-0.4 3.5,-0.4
  Top Layer region: -3.5,-0.4 -2.3,-0.4 -2.3,-2.3 -3.5,-2.3
  silkscreen extent -4.1,-0.2 4.1,1.4, body extent -4.1,-3.93 4.1,1.5, height 2.72
DRL0008A-MFG [mm]
  rrect33% 0.67x0.3 smd paste+0 mask+0: 1(-0.74,0.75) 2(-0.74,0.25) 3(-0.74,-0.25) 4(-0.74,-0.75) 5(0.74,-0.75) 6(0.74,-0.25) 7(0.74,0.25) 8(0.74,0.75)
  silkscreen extent -1.77,-1.28 0.65,1.28, body extent -0.8,-1.05 0.8,1.05, height 0.6
DRY0006A [mm] "USON-6"
  rrect67% 0.45x0.3 smd paste-0.05 mask-0.05: 1(-0.275,0.5)
  rrect67% 0.4x0.3 smd paste-0.05 mask-0.05: 2(-0.3,0) 3(-0.3,-0.5) 4(0.3,-0.5) 5(0.3,0) 6(0.3,0.5)
  body extent -0.5,-0.72 0.5,0.72, height 0.58
Fiducial10-20 [mm]
  round 1 smd mask+0.5: 1(0,0)
  Top Layer keep-out circle w1.178: c0,0 r0.5
FP-AC0402FR-0747K5L_0402-MFG [mm]
  rrect20% 0.5x0.6 smd paste+0 mask+0: 1(-0.5,0) 2(0.5,0)
  silkscreen extent -0.5,-0.67 0.5,0.67, body extent -0.5,-0.25 0.5,0.25, height 0.37
FP-AYZ0102AGRLC_SMT_SW_7MM2_5MM3-MFG [mm]
  rrect10% 1x1.2 smd paste+0 mask+0: 1(-2.5,3.1) 2(0,3.1) 3(2.5,3.1)
  round 0.85 hole 0.85 unplated paste-2539.97 mask+0: ""(-1.5,0.5) ""(1.5,0.5)
  silkscreen extent -3.6,-2 3.6,4.37, body extent -3.6,-2 3.6,3.3, height 1.5
"FP-Castellation 2.54mm_75mills" [mil]
  round 33.75 smd far side paste-39370.1 mask+0: 1(56.25,0)
  round 33.75 smd paste-39370.1 mask+0: 1(56.25,0)
  Top Layer region: 75,37.5 0,37.5 16.27,33.79 29.32,23.38 36.56,8.34 36.56,-8.34 29.32,-23.38 16.27,-33.79 0,-37.5 0,-37.5 75,-37.5
  Bottom Layer region: 75,37.5 0,37.5 16.27,33.79 29.32,23.38 36.56,8.34 36.56,-8.34 29.32,-23.38 16.27,-33.79 0,-37.5 0,-37.5 75,-37.5
FP-CRCW040218K0FKEDC_0402-MFG [mm]
  rrect25% 0.4x0.6 smd paste+0 mask+0: 1(-0.45,0) 2(0.45,0)
  silkscreen extent -0.55,-0.67 0.55,0.67, body extent -0.5,-0.25 0.5,0.25, height 0.35
"FP-DFE201210U-R47M=P2_0805 (2012)-MFG" [mm]
  rrect13% 0.8x1.4 smd paste+0 mask+0: 1(-0.8,0) 2(0.8,0)
  silkscreen extent -1.2,-1.07 1.2,1.07, body extent -1,-0.6 1,0.6, height 1
FP-ERJ-1RHD1002C_0201-MFG [mm]
  rrect40% 0.25x0.3 smd paste+0 mask+0: 1(-0.3,0) 2(0.3,0)
  silkscreen extent -0.32,-0.54 0.32,0.54, body extent -0.3,-0.15 0.3,0.15, height 0.26
FP-ERJ-3GEY0R00V_0603-MFG [mm]
  rrect15% 0.65x0.9 smd paste+0 mask+0: 1(-0.725,0) 2(0.725,0)
  silkscreen extent -1.03,-0.87 1.03,0.87, body extent -0.8,-0.4 0.8,0.4, height 0.55
FP-GCJ21BR71C475KA01L_0805-MFG [mm]
  rrect14% 0.7x1.3 smd paste+0 mask+0: 1(-1,0) 2(1,0)
  silkscreen extent -0.28,-0.72 0.28,0.72, body extent -1,-0.63 1,0.63, height 1.45
FP-GCM0335C1E220JA16D_0201-MFG [mm] "Recommended Land Pattern"
  rrect40% 0.25x0.3 smd paste+0 mask+0: 1(-0.238,0) 2(0.238,0)
  silkscreen extent -0.3,-0.5 0.3,0.5, body extent -0.3,-0.15 0.3,0.15, height 0.33
FP-GRM155R61A225ME01D_0402-MFG [mm]
  rrect25% 0.4x0.5 smd paste+0 mask+0: 1(-0.4,0) 2(0.4,0)
  silkscreen extent -0.5,-0.65 0.5,0.65, body extent -0.5,-0.25 0.5,0.25, height 0.55
"FP-RC0201JR-070RL_0201 (0603 Metric)-IPC_C" [mil]
  rrect38% 13.94x10.34 smd paste+0 mask+0: 1(-10.01,0) 2(10.01,0)
  body extent -12,-6 12,6, height 10
FP-RC0402JR-070RP_0402-MFG [mm]
  rrect20% 0.5x0.6 smd paste+0 mask+0: 1(-0.5,0) 2(0.5,0)
  silkscreen extent -0.5,-0.67 0.5,0.67, body extent -0.5,-0.25 0.5,0.25, height 0.4
FP-RT0402FRE0733R2L_0402-MFG [mm]
  rrect20% 0.5x0.6 smd paste+0 mask+0: 1(-0.5,0) 2(0.5,0)
  silkscreen extent -0.5,-0.71 0.5,0.7, body extent -0.5,-0.25 0.5,0.25, height 0.35
FP-SPH201610UR10MT_SMT_IND_2MM0_1MM6-MFG [mm] "Recommended Land Pattern"
  rrect14% 0.7x1.7 smd paste+0 mask+0: 1(-0.7,0) 2(0.7,0)
  silkscreen extent -1.1,-1.22 1.1,1.22, body extent -1,-0.8 1,0.8, height 1
FP-SSM3K35AMFV,L3F_SOT-723-MFG [mm]
  rrect25% 0.45x0.4 smd paste+0 mask+0: 1(-0.575,0.4) 2(-0.575,-0.4)
  rrect22% 0.45x0.5 smd paste+0 mask+0: 3(0.575,0)
  silkscreen extent -0.43,-0.97 0.43,0.97, body extent -0.6,-0.6 0.6,0.6, height 0.55
FP-VLMY1500-GS08_0402-MFG [mm]
  rrect17% 0.6x0.7 smd paste+0 mask+0: 1(-0.475,0) 2(0.475,0)
  silkscreen extent -1.45,-0.72 0.6,0.72, body extent -0.5,-0.25 0.5,0.25, height 0.35
FP-XRCGB40M000F1S2GR0_SMT_CRYSTAL_2MM0_1MM6-MFG [mm]
  rrect14% 0.75x0.7 smd paste+0 mask+0: 1(-0.675,-0.5) 2(0.675,-0.5) 3(0.675,0.5) 4(-0.675,0.5)
  silkscreen extent -1.43,-1.52 1.43,0.85, body extent -1,-0.8 1,0.8, height 0.7
IEC_HotSurface_Small [mil]
  silkscreen extent -107,-93 107,92
SOD-128 [mm] "SMD, 2-Leads, Body 4x2.7mm, Height 1.1mm"
  rect 1.4x2.1 smd paste-0.1: 1(-2.2,0) 2(2.2,0)
  silkscreen extent -3.45,-1.45 2.95,1.45, body extent -2.5,-1.35 2.5,1.35, height 1.11
SSOP-16 [mm] "SSOP, 16-Leads, Body 4.9x3.91mm, Pitch 0.635mm"
  rrect22% 1.45x0.45 smd: 1(-2.725,2.222) 2(-2.725,1.588) 3(-2.725,0.953) 4(-2.725,0.318) 5(-2.725,-0.317) 6(-2.725,-0.952) 7(-2.725,-1.587) 8(-2.725,-2.222) 9(2.725,-2.222) 10(2.725,-1.588) 11(2.725,-0.953) 12(2.725,-0.318) 13(2.725,0.317) 14(2.725,0.952) 15(2.725,1.587) 16(2.725,2.222)
  silkscreen extent -1.6,-2.5 1.6,2.8, body extent -2.99,-2.5 3,2.5, height 1.75
Sullins_GRPB122VWVN [mm] "Header, 1.27mm, 12x2, TH"
  rect 1x1 hole 0.7: 1(-0.635,6.985)
  round 1 hole 0.7: 2(0.635,6.985) 3(-0.635,5.715) 4(0.635,5.715) 5(-0.635,4.445) 6(0.635,4.445) 7(-0.635,3.175) 8(0.635,3.175) 9(-0.635,1.905) 10(0.635,1.905) 11(-0.635,0.635) 12(0.635,0.635) 13(-0.635,-0.635) 14(0.635,-0.635) 15(-0.635,-1.905) 16(0.635,-1.905) 17(-0.635,-3.175) 18(0.635,-3.175) 19(-0.635,-4.445) 20(0.635,-4.445) 21(-0.635,-5.715) 22(0.635,-5.715) 23(-0.635,-6.985) 24(0.635,-6.985)
  silkscreen extent -2,-7.62 1.7,7.62, body extent -1.7,-7.62 1.7,7.62, height 4
TI_Symbol_Overlay_Small [mil]
  silkscreen extent -90,-88 91,88
TP_25MIL-SMT#1 [mil]
  round 25 smd far side mask-2.5: 1(0,0)
TP_25MIL-SMT#2 [mil]
  round 25 smd mask-2.5: 1(0,0)
USON-8L [mm] "SON, 8-Leads, Body 3x2mm, Pitch 0.5mm"
  rrect40% 0.6x0.25 smd: 1(-1.4,0.75) 2(-1.4,0.25) 3(-1.4,-0.25) 4(-1.4,-0.75) 5(1.4,-0.75) 6(1.4,-0.25) 7(1.4,0.25) 8(1.4,0.75)
  rrect50% 0.2x1.6 smd: 9(0,0)
  silkscreen extent -1.55,-1.17 0.65,1.17, body extent -1.55,-1.05 1.55,1.05, height 0.6
WEEE_Minimum [mil] "WEEElie bin"
  silkscreen extent -95,-172 99,104

## Part data
C1 C4 C7: library part CMP-0006272-2, "CAP, CERM, 1 uF, 10 V, +/- 10%, X6S, 0402", Cap_Case=0402, Manufacturer=TDK, Supplier Part Number 1=445-4978-1-ND, TempCo=X5R, Tolerance_%=10%, Value1=Unknown, Value2=16V, ValueDisplayed=1uF, AEC Category=Q200, AEC Grade=N/A, AEC Qualified=N, Cap_F=1¦ÌF, ComponentLink1Description="Datasheet link", ComponentLink1URL=https://product.tdk.com/info/en/catalog/datasheets/mlcc_commercial_general_en.pdf, CompType=Capacitor, LatestRevisionDate=2017-03-09, MountType=SMT, PackageReference=0402, PartNumber=GRT155C81A105KE01D, Polarized=N, Published=2008-06-19, Publisher="Texas Instruments", RoHS=Y, SizeArea_mm2=0.5, SizeAreaWB_mm2=3, SizeX_mm=1, SizeY_mm=0.5, SizeZ_mm=0.6, Supplier 1=Digi-Key, Supplier 2=Newark, Supplier 3=Mouser, Supplier Part Number 2=90R7590, Supplier Part Number 3=810-C1005X5R1C105K, TaMax_C=85¡ãC, TaMin_C=-55¡ãC, Technology=Ceramic, U/M=EA, VDC_V=16V
C2 C19: library part CMP-0006408-2, "CAP, CERM, 10 pF, 50 V, +/- 5%, C0G/NP0, 0402", Cap_Case=0402, Manufacturer=MuRata, Supplier Part Number 1=81-GRM1555C1H100JA1D, TempCo=C0G/NP0, Tolerance_%=5%, Value1=Unknown, Value2=50V, ValueDisplayed=10pF, AEC Category=Q200, AEC Qualified=?, Cap_F=10pF, ComponentLink1Description="Datasheet link", ComponentLink1URL=http://search.murata.co.jp/Ceramy/PnsearchViewAction.do?HnOFG=ON&HnNFG=ON&SEL_CNT=50&sLang=en&sKey=GRM1555C1H100JA01D&x=9&y=9&search=startwith, CompType=Capacitor, LatestRevisionDate=2017-03-09, MountType=SMT, PackageReference=0402, PartNumber=GRM1555C1H100JA01D, Polarized=N, Published=2008-06-19, Publisher="Texas Instruments", RoHS=Y, SizeArea_mm2=0.5, SizeAreaWB_mm2=3, SizeX_mm=1, SizeY_mm=0.5, SizeZ_mm=0.6, Supplier 1=Mouser, TaMax_C=125¡ãC, TaMin_C=-55¡ãC, Technology=Ceramic, U/M=EA, VDC_V=50V
C3 C8 C10: library part CMP-0006356-2, "CAP, CERM, 0.1 uF, 50 V, +/- 10%, X7R, AEC-Q200 Grade 1, 0402", Cap_Case=0402, Manufacturer=MuRata, Supplier Part Number 1=490-10672-1-ND, TempCo=X7R, Tolerance_%=10%, Value1=Unknown, Value2=50V, ValueDisplayed=0.1uF, AEC Category=Q200, AEC Grade=1, AEC Qualified=Y, Cap_F=100nF, ComponentLink1Description="Datasheet link", ComponentLink1URL=http://psearch.en.murata.com/capacitor/product/GCM155R71H104KE02%23.pdf, CompType=Capacitor, LatestRevisionDate=2017-03-09, MountType=SMT, PackageReference=0402, PartNumber=GCM155R71H104KE02D, Polarized=N, Published=2008-06-19, Publisher="Texas Instruments", RoHS=Y, SizeArea_mm2=0.5, SizeAreaWB_mm2=3, SizeX_mm=1, SizeY_mm=0.5, SizeZ_mm=0.6, Supplier 1=Digi-Key, Supplier 2=Mouser, Supplier Part Number 2=81-GCM155R71H104KE2D, TaMax_C=125¡ãC, TaMin_C=-55¡ãC, Technology=Ceramic, U/M=EA, VDC_V=50V
C5 C9 C14 C17 C20: library part CMP-0097887-1, "Chip Multilayer Ceramic Capacitors for General Purpose, 0402, 2.2uF, X5R, 15%, 20%, 10V", Manufacturer=Murata, Operating Temperature Range="-55¡ãC to +85¡ãC", TempCo=15%, Temperature Characteristic=X5R, Tolerance_%=20%, ValueDisplayed=2.2uF, AEC Qualified=No, Cap_F=2.2¦ÌF, ComponentLink1Description=Datasheet, ComponentLink1URL=https://www.murata.com/en-us/products/productdetail?partno=GRM155R61A225ME01%23, datasheet=https://www.murata.com/en-us/products/productdetail?partno=GRM155R61A225ME01%23, Datasheet Path=datasheets/Cap-GRM155R61A225ME01D.pdf, helpURL=https://upverter.com/upn/revision/9c1060debce10243/, Lead Free=Yes, PackageReference=0402, Part Number=GRM155R61A225ME01D, PartNumber=GRM155R61A225ME01D, RoHS=TRUE, SizeZ_mm=0.55mm, VDC_V=10V
C6: library part CMP-0006298-2, "CAP, CERM, 0.047 uF, 50 V, +/- 10%, X7R, 0402", Cap_Case=0402, Manufacturer=TDK, Supplier Part Number 1=445-7336-1-ND, TempCo=X7R, Tolerance_%=10%, Value1="0.06407 ohm", Value2=50V, ValueDisplayed=0.047uF, AEC Category=Q200, AEC Grade=N/A, AEC Qualified=N, Cap_F=47nF, ComponentLink1Description="Datasheet link", ComponentLink1URL=https://product.tdk.com/en/search/capacitor/ceramic/mlcc/info?part_no=C1005X7R1H473K050BB, CompType=Capacitor, ESR_ohm=0.06407, IRMS_A=6.46122dA, LatestRevisionDate=2017-03-09, MountType=SMT, PackageReference=0402, PartNumber=C1005X7R1H473K050BB, Polarized=N, Published=2008-06-19, Publisher="Texas Instruments", RoHS=Y, SizeArea_mm2=0.5, SizeAreaWB_mm2=3, SizeX_mm=1, SizeY_mm=0.5, SizeZ_mm=0.6, Supplier 1=Digi-Key, Supplier 2=Newark, Supplier 3=Mouser, Supplier Part Number 2=04X3233, Supplier Part Number 3=810-C1005X7R1H473K, TaMax_C=125¡ãC, TaMin_C=-55¡ãC, Technology=Ceramic, U/M=EA, VDC_V=50V
C11 C16: library part CMP-0078699-1, "CAP, CERM, 47 ¦ÌF, 10 V,+/- 20%, X5R, 0805", Cap_Case=0805, Manufacturer=MuRata, Supplier Part Number 1=490-9961-1-ND, TempCo=X5R, Tolerance_%=20%, Value2=10V, ValueDisplayed=47¦ÌF, AEC Category=Q200, AEC Grade=N/A, AEC Qualified=N, Cap_F=47¦ÌF, ComponentLink1Description="Datasheet link", ComponentLink1URL=http://search.murata.co.jp/Ceramy/image/img/A01X/G101/ENG/GRM21BR61A476ME15-01.pdf, CompType=Capacitor, Green_EU RoHS=Passed, Green_EU RoHS-2=Incomplete, Green_Lifecycle=Active, Green_REACh=Passed, MountType=SMT, PackageReference=0805, PartNumber=GRM21BR61A476ME15L, Polarized=N, RoHS=Y, SizeArea_mm2=2.5, SizeAreaWB_mm2=6.75, SizeX_mm=2, SizeY_mm=1.25, SizeZ_mm=1.45, Supplier 1=Digi-Key, Supplier 2=Newark, Supplier 3=Mouser, Supplier Part Number 2=96Y9273, Supplier Part Number 3=81-GRM21BR61A476ME5L, TaMax_C=85¡ãC, TaMin_C=-55¡ãC, Technology=Ceramic, U/M=EA, VDC_V=10V
C13: library part CMP-0006648-2, "CAP, CERM, 0.22 uF, 16 V, +/- 10%, X7R, 0402", Cap_Case=0402, Manufacturer=MuRata, Supplier Part Number 1=490-5418-1-ND, TempCo=X7R, Tolerance_%=10%, Value1=Unknown, Value2=16V, ValueDisplayed=0.22uF, AEC Category=Q200, AEC Qualified=?, Cap_F=220nF, ComponentLink1Description="Datasheet link", ComponentLink1URL=http://search.murata.co.jp/Ceramy/PnsearchViewAction.do?HnOFG=ON&HnNFG=ON&SEL_CNT=50&sLang=en&sKey=GRM155R71C224KA12D&x=9&y=9&search=startwith, CompType=Capacitor, LatestRevisionDate=2017-03-09, MountType=SMT, PackageReference=0402, PartNumber=GRM155R71C224KA12D, Polarized=N, Published=2008-06-19, Publisher="Texas Instruments", RoHS=Y, SizeArea_mm2=0.5, SizeAreaWB_mm2=3, SizeX_mm=1, SizeY_mm=0.5, SizeZ_mm=0.6, Supplier 1=Digi-Key, Supplier 2=Mouser, Supplier Part Number 2=81-GRM155R71C224KA2D, TaMax_C=125¡ãC, TaMin_C=-55¡ãC, Technology=Ceramic, U/M=EA, VDC_V=16V
C15 C21 C23 C25 C26 C44 C49 C50 C56 C72 C128 C129: library part CMP-0007497-5, "CAP, CERM, 10 uF, 10 V, +/- 20%, X7R, 0603", Cap_Case=0603, Manufacturer=MuRata, Supplier Part Number 1=81-GRM188Z71A106MA3D, TempCo=X7R, Tolerance_%=20%, Value1=Unknown, Value2=10V, ValueDisplayed=10uF, AEC Category=Q200, AEC Grade=N/A, AEC Qualified=N, Cap_F=10¦ÌF, ComponentLink1Description="Datasheet link", ComponentLink1URL=http://psearch.en.murata.com/capacitor/product/GRM188Z71A106MA73%23.pdf, CompType=Capacitor, LatestRevisionDate=2017-03-09, MountType=SMT, PackageReference=0603, PartNumber=GRM188Z71A106MA73D, Polarized=N, Published=2008-06-19, Publisher="Texas Instruments", RoHS=Y, SizeArea_mm2=1.28, SizeAreaWB_mm2=4.68, SizeX_mm=1.6, SizeY_mm=0.8, SizeZ_mm=1, Supplier 1=Mouser, TaMax_C=125¡ãC, TaMin_C=-55¡ãC, Technology=Ceramic, U/M=EA, VDC_V=10V
C18 C22 C35: library part CMP-0064947-2, "CAP, CERM, 1 uF, 6.3 V,+/- 10%, X7R, 0402", Cap_Case=0402, Manufacturer=MuRata, Supplier Part Number 1=490-10024-1-ND, TempCo=X7R, Tolerance_%=10%, Value1=Unknown, Value2=6.3V, ValueDisplayed=1uF, AEC Category=Q200, AEC Grade=N/A, AEC Qualified=N, Cap_F=1¦ÌF, ComponentLink1Description="Datasheet link", ComponentLink1URL=http://search.murata.co.jp/Ceramy/image/img/A01X/G101/ENG/GRM155R70J105KA12-01.pdf, CompType=Capacitor, LatestRevisionDate=2017-06-05, MountType=SMT, PackageReference=0402, PartNumber=GRM155R70J105KA12D, Polarized=N, Published=2008-06-19, Publisher="Texas Instruments", RoHS=Y, SizeArea_mm2=0.5, SizeAreaWB_mm2=3, SizeX_mm=1, SizeY_mm=0.5, SizeZ_mm=0.6, Supplier 1=Digi-Key, Supplier 2=Mouser, Supplier 3=Farnell, Supplier Part Number 2=81-GRM155R70J105KA2D, Supplier Part Number 3=2688505RL, TaMax_C=125¡ãC, TaMin_C=-55¡ãC, Technology=Ceramic, U/M=EA, VDC_V=6.3V
C27: library part CMP-0094778-1, "Multilayer Ceramic Capacitors MLCC - SMD/SMT 0805 4.7uF 10%, 16VDC,  X7R 15%", Manufacturer=Murata, Operating Temperature Range="-55¡ãC to +125¡ãC", TempCo=15%, Temperature Characteristic=X7R, Tolerance_%=10%, ValueDisplayed=4.7uF, AEC Grade="Grade 1", AEC Qualified=Yes, Cap_F=4.7¦ÌF, ComponentLink1Description=Datasheet, ComponentLink1URL=https://www.murata.com/en-us/products/productdetail?partno=GCJ21BR71C475KA01%23, datasheet=https://www.murata.com/en-us/products/productdetail?partno=GCJ21BR71C475KA01%23, Datasheet Path=datasheets/Cap-GCJ21BR71C475KA01L.pdf, helpURL=https://upverter.com/upn/revision/6981e148239812b6/, Lead Free=Yes, PackageReference=0805, Part Number=GCJ21BR71C475KA01L, PartNumber=GCJ21BR71C475KA01L, RoHS=TRUE, SizeZ_mm=1.45mm, VDC_V=16V
C28 C60 C73: library part CMP-0007398-4, "CAP, CERM, 0.47 uF, 16 V, +/- 10%, X7R, 0603", Cap_Case=0603, Manufacturer=MuRata, Supplier Part Number 1=490-3295-1-ND, TempCo=X7R, Tolerance_%=10%, Value1=Unknown, Value2=16V, ValueDisplayed=0.47uF, AEC Category=Q200, AEC Qualified=?, Cap_F=470nF, ComponentLink1Description="Datasheet link", ComponentLink1URL=http://search.murata.co.jp/Ceramy/PnsearchViewAction.do?HnOFG=ON&HnNFG=ON&SEL_CNT=50&sLang=en&sKey=GRM188R71C474KA88D&x=9&y=9&search=startwith, CompType=Capacitor, LatestRevisionDate=2017-03-09, MountType=SMT, PackageReference=0603, PartNumber=GRM188R71C474KA88D, Polarized=N, Published=2008-06-19, Publisher="Texas Instruments", RoHS=Y, SizeArea_mm2=1.28, SizeAreaWB_mm2=4.68, SizeX_mm=1.6, SizeY_mm=0.8, SizeZ_mm=1, Supplier 1=Digi-Key, Supplier 2=Mouser, Supplier 3=Farnell, Supplier Part Number 2=81-GRM188R71C474KA88, Supplier Part Number 3=1828893, TaMax_C=125¡ãC, TaMin_C=-55¡ãC, Technology=Ceramic, U/M=EA, VDC_V=16V
C29: library part CMP-0078265-1, "CAP, CERM, 0.22 ¦ÌF, 16 V,+/- 10%, X7R, AEC-Q200 Grade 1, 0402", Cap_Case=0402, Manufacturer=MuRata, Supplier Part Number 1=490-10671-1-ND, TempCo=X7R, Tolerance_%=10%, Value2=16V, ValueDisplayed=0.22¦ÌF, AEC Category=Q200, AEC Grade=1, AEC Qualified=Y, Cap_F=220nF, ComponentLink1Description="Datasheet link", ComponentLink1URL=http://psearch.en.murata.com/capacitor/product/GCM155R71C224KE02%23.pdf, CompType=Capacitor, MountType=SMT, PackageReference=0402, PartNumber=GCM155R71C224KE02D, Polarized=N, RoHS=Y, SizeArea_mm2=0.5, SizeAreaWB_mm2=3, SizeX_mm=1, SizeY_mm=0.5, SizeZ_mm=0.6, Supplier 1=Digi-Key, Supplier 2=Mouser, Supplier Part Number 2=81-GCM155R71C224KE2D, TaMax_C=125¡ãC, TaMin_C=-55¡ãC, Technology=Ceramic, U/M=EA, VDC_V=16V
C30: library part CMP-0064967-2, "CAP, CERM, 0.47 uF, 10 V,+/- 10%, X7S, 0402", Cap_Case=0402, Manufacturer=MuRata, Supplier Part Number 1=490-14427-1-ND, TempCo=X7S, Tolerance_%=10%, Value1=Unknown, Value2=10V, ValueDisplayed=0.47uF, AEC Category=Q200, AEC Grade=N/A, AEC Qualified=N, Cap_F=470nF, ComponentLink1Description="Datasheet link", ComponentLink1URL=http://search.murata.co.jp/Ceramy/image/img/A01X/G101/ENG/GCM155C71A474KE36-01.pdf, CompType=Capacitor, LatestRevisionDate=2017-06-05, MountType=SMT, PackageReference=0402, PartNumber=GCM155C71A474KE36D, Polarized=N, Published=2008-06-19, Publisher="Texas Instruments", RoHS=Y, SizeArea_mm2=0.5, SizeAreaWB_mm2=3, SizeX_mm=1, SizeY_mm=0.5, SizeZ_mm=0.6, Supplier 1=Digi-Key, Supplier 2=Mouser, Supplier Part Number 2=81-GCM155C71A474KE6D, TaMax_C=125¡ãC, TaMin_C=-55¡ãC, Technology=Ceramic, U/M=EA, VDC_V=10V
C31: library part CMP-0007497-5, "CAP, CERM, 10 uF, 10 V, +/- 10%, X5R, 0603", Cap_Case=0603, Manufacturer=MuRata, Supplier Part Number 1=81-GRM188Z71A106MA3D, TempCo=X7R, Tolerance_%=20%, Value1=Unknown, Value2=10V, ValueDisplayed=10uF, AEC Category=Q200, AEC Grade=N/A, AEC Qualified=N, Cap_F=10¦ÌF, ComponentLink1Description="Datasheet link", ComponentLink1URL=http://psearch.en.murata.com/capacitor/product/GRM188Z71A106MA73%23.pdf, CompType=Capacitor, LatestRevisionDate=2017-03-09, MountType=SMT, PackageReference=0603, PartNumber=GRT188R61A106KE13D, Polarized=N, Published=2008-06-19, Publisher="Texas Instruments", RoHS=Y, SizeArea_mm2=1.28, SizeAreaWB_mm2=4.68, SizeX_mm=1.6, SizeY_mm=0.8, SizeZ_mm=1, Supplier 1=Mouser, TaMax_C=125¡ãC, TaMin_C=-55¡ãC, Technology=Ceramic, U/M=EA, VDC_V=10V
C32: library part CMP-0006564-3, "CAP, CERM, 10 uF, 10 V, +/- 20%, X5R, 0402", Cap_Case=0402, Manufacturer=MuRata, TempCo=X5R, Tolerance_%=20%, Value1=Unknown, Value2=10V, ValueDisplayed=10uF, AEC Category=Q200, AEC Qualified=?, Cap_F=10¦ÌF, ComponentLink1Description="Datasheet link", ComponentLink1URL="https://sps06.itg.ti.com/sites/KMS/crossdivteams/altium/docs/ComponentDatasheets/GRM155R61A106ME11 Electrical Characteristics Data.pdf", CompType=Capacitor, LatestRevisionDate=2017-03-09, MountType=SMT, PackageReference=0402, PartNumber=GRM155R61A106ME11D, Polarized=N, Published=2008-06-19, Publisher="Texas Instruments", RoHS=Y, SizeArea_mm2=0.5, SizeAreaWB_mm2=3, SizeX_mm=1, SizeY_mm=0.5, SizeZ_mm=0.6, TaMax_C=85¡ãC, TaMin_C=-55¡ãC, Technology=Ceramic, U/M=EA, VDC_V=10V